# EAGLE board duckypad (EAGLE 9.6.2)
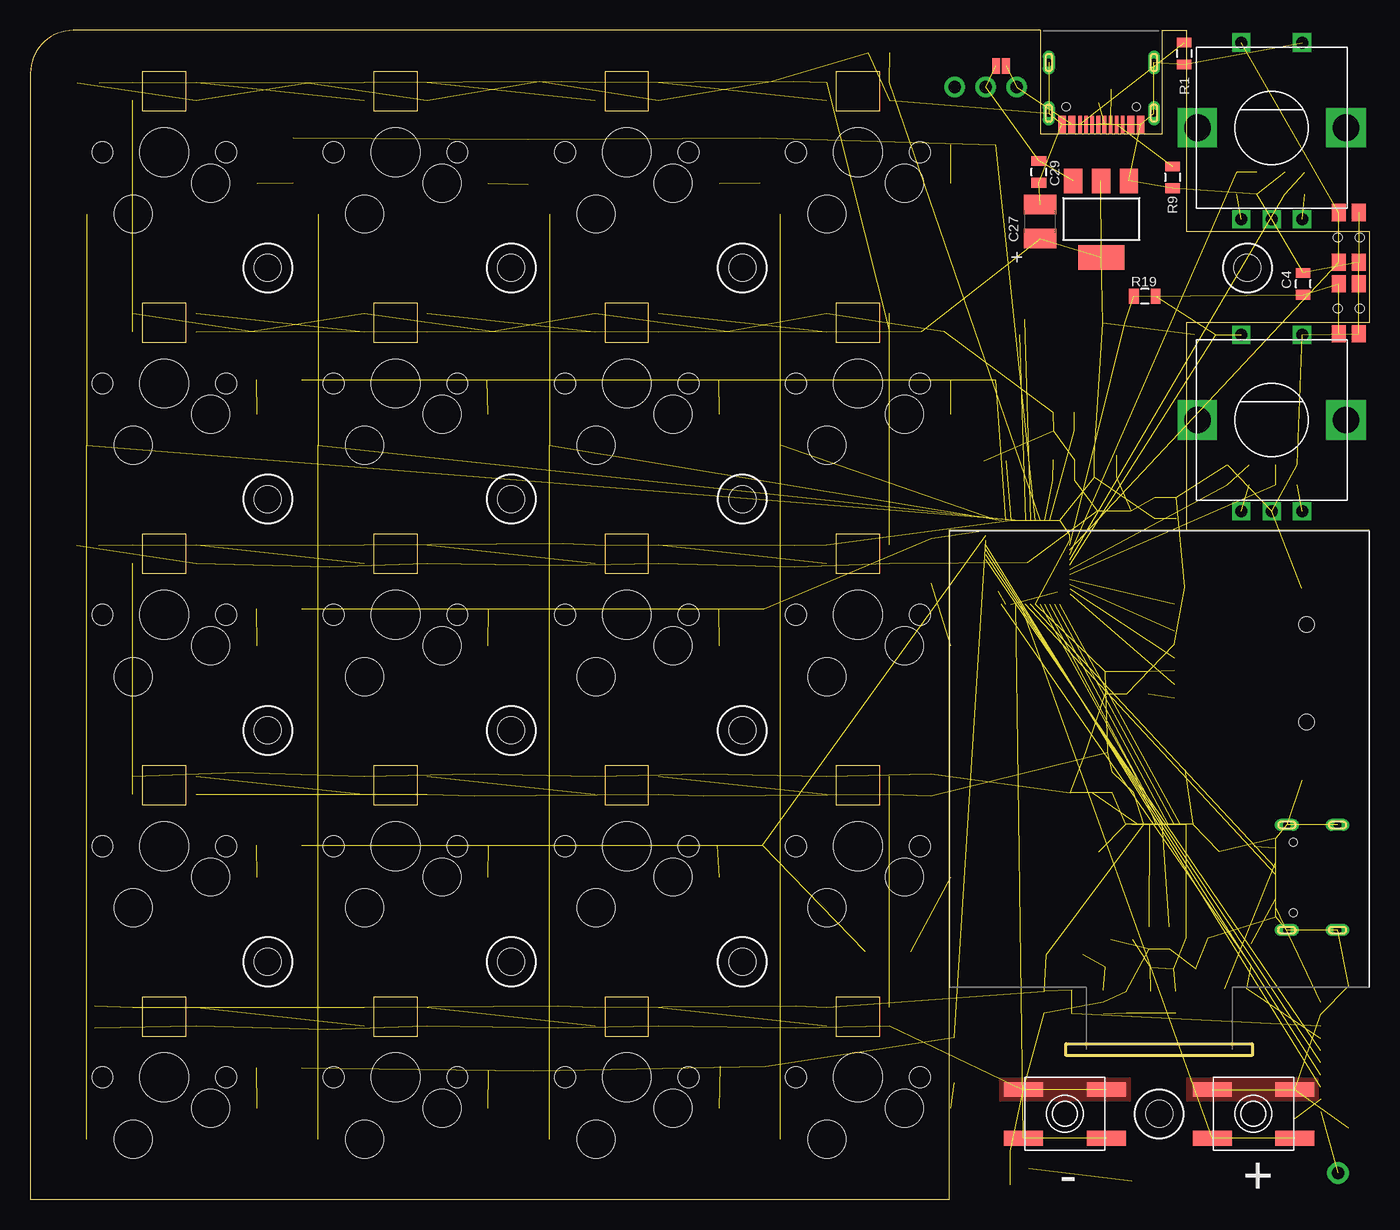
[diagram p0: board, top side]
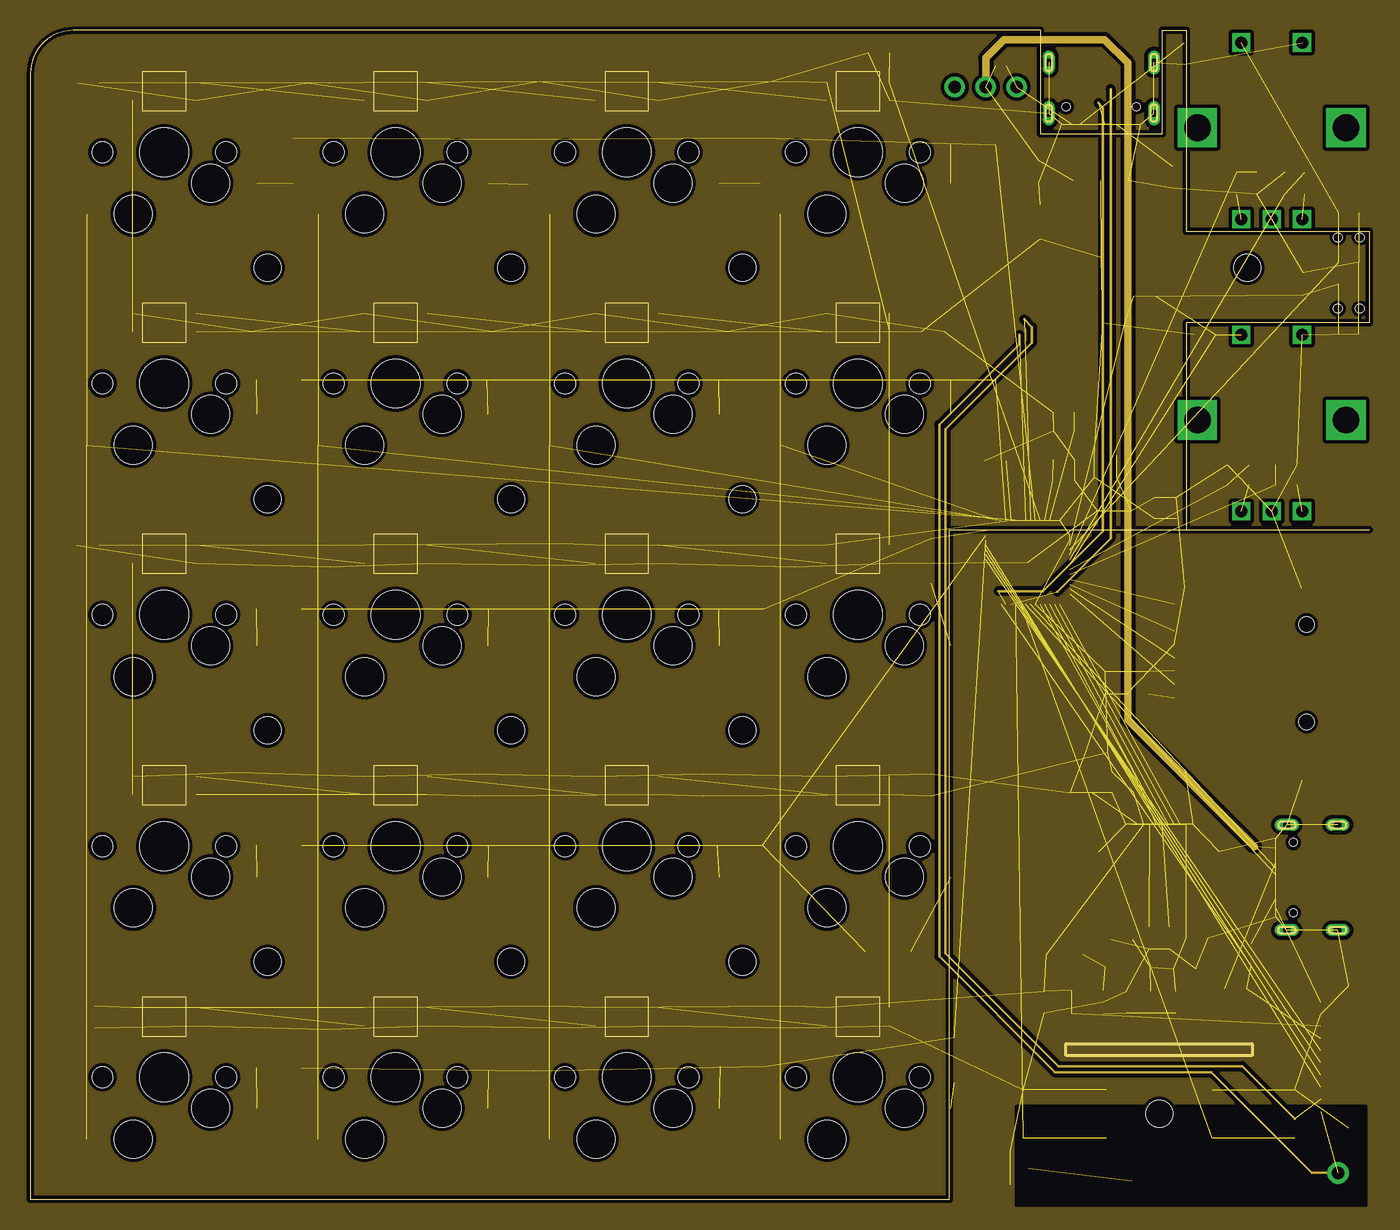
[diagram p1: board, inner layer pwr]
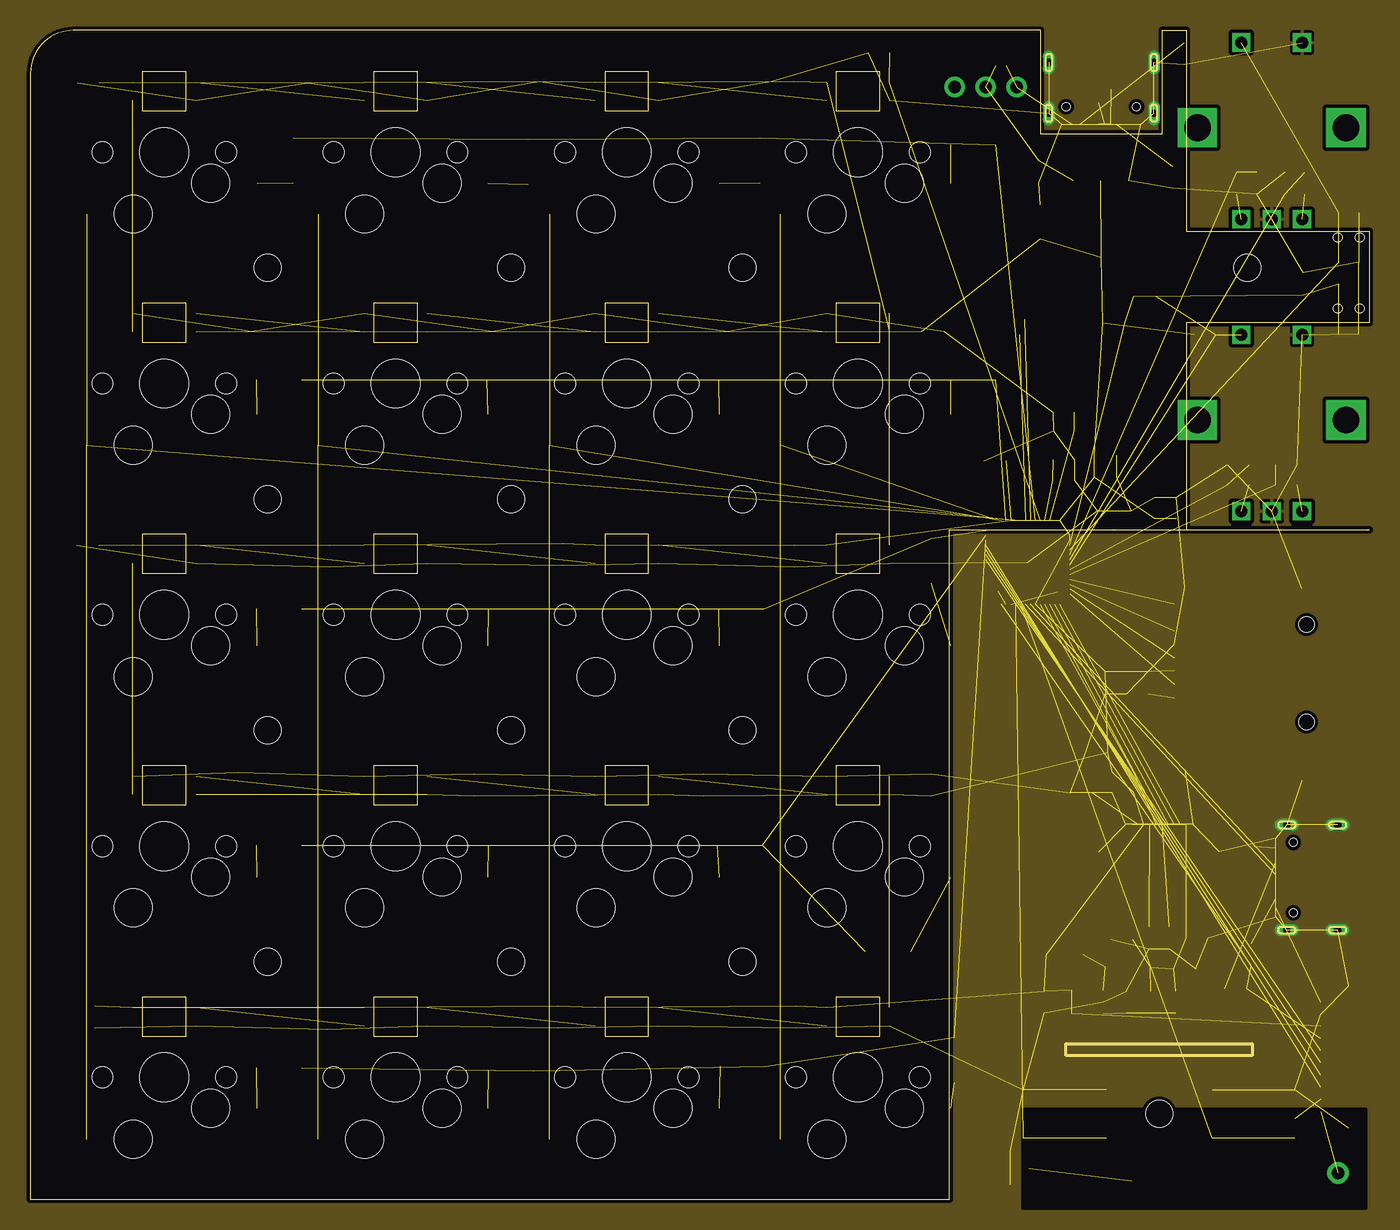
[diagram p2: board, inner layer gnd]
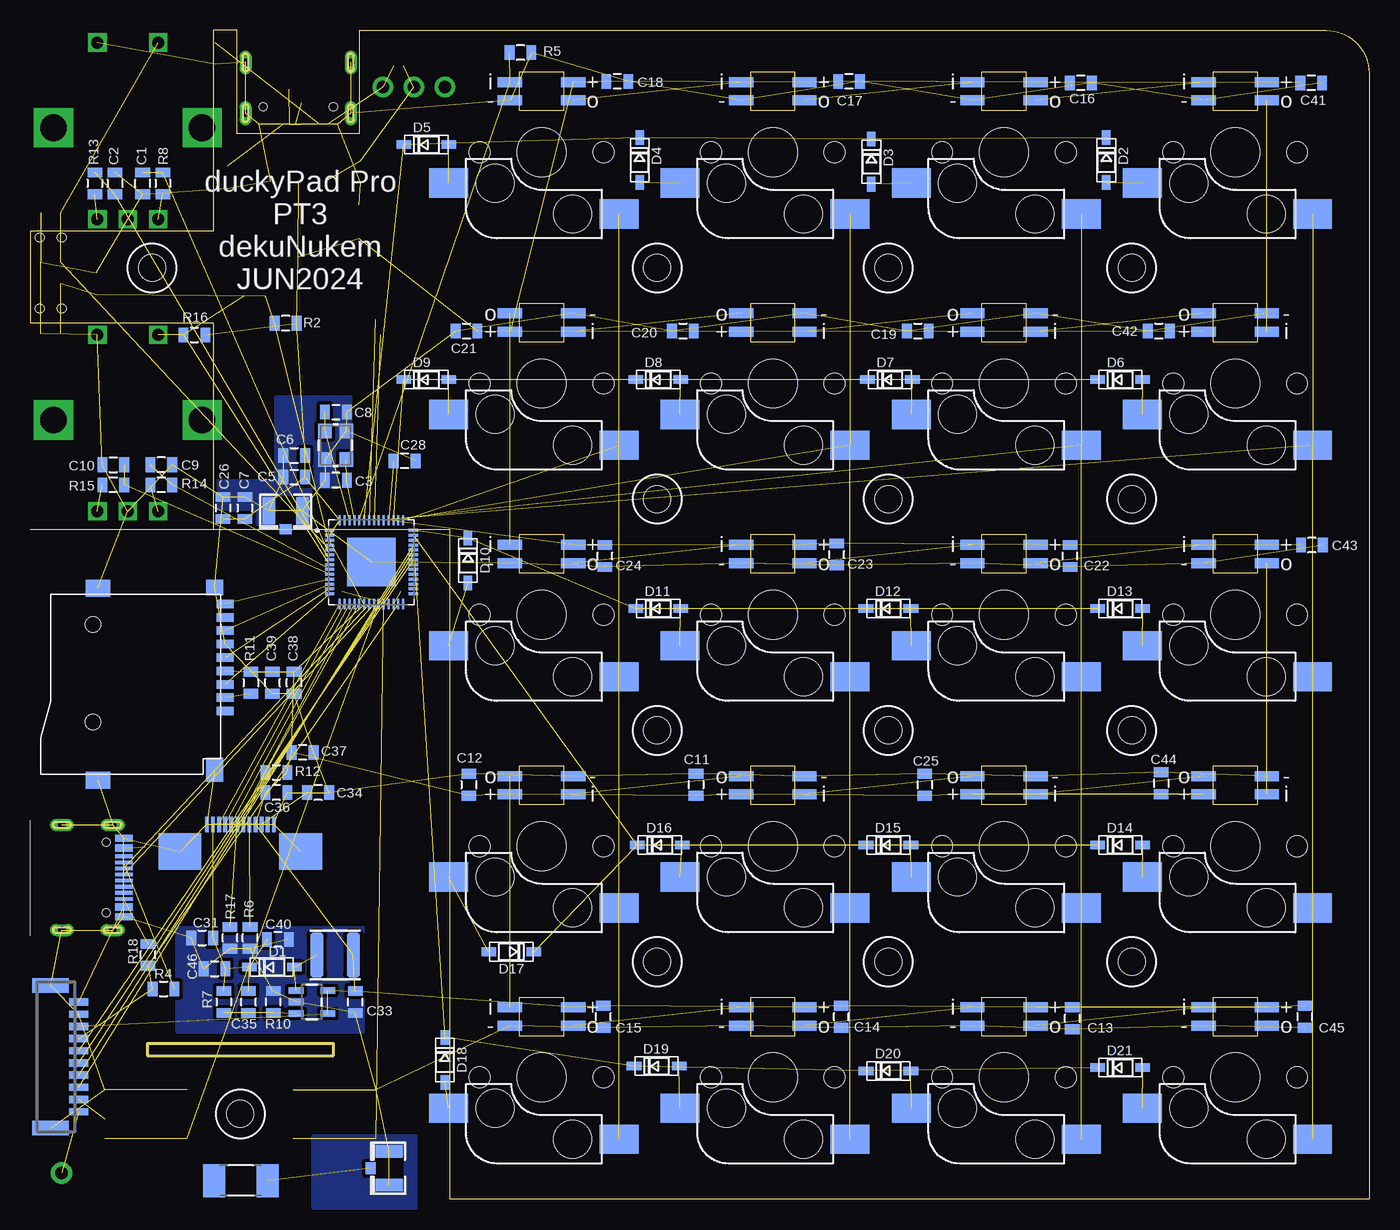
[diagram p3: board, bottom side, seen from below]

Size 110 x 96 mm. Coordinates in mm from the lower left corner, seen from the top.
Outline: 95,55 75.5,55 75.5,0 0,0 0,92.5 arc-90 3.5,96 83,96 83,87.5 93,87.5 93,96 95,96 95,79.5 110,79.5 110,72 95,72 95,55
Outline: 95,55 110,55
Copper layers (1+2*15+16): Top 0.035559375mm / dielectric 0.47751875mm / pwr 0.035559375mm / dielectric 0.47751875mm / gnd 0.035559375mm / dielectric 0.47751875mm / Bottom 0.035559375mm
Design rules "SparkFun-4-Layer-General-JLCPCB *": minimum track width 6mil, minimum drill 12mil, track to track 6mil, track to pad 6mil, pad to pad 6mil, via to via 6mil, smd to smd 6mil, copper to edge 6mil, drill to drill 6mil, minimum pad ring 7mil, minimum via ring 7mil, stop-mask expansion 3mil, vias tented up to drill 25mil, thermal gap 10mil
tRestrict: area 77.2,89.7 to 82.8,93; area 77.1,90.4 to 82.6,93.7
bRestrict: area 76.9,89.7 to 82.5,93

## Footprints (pad centres in the part's own frame; a part is rotated, then mirrored left to right if it is on the bottom)
0805 = smd 0.8 x 1.2: 1 -0.9,0; 2 0.9,0
C1210 = smd 1.6 x 2.7: 1 -1.4,0; 2 1.4,0
ADAFRUIT_CHANGED_SOD-123 = smd 1.2 x 0.7: A 1.85,0; C -1.85,0
SOT223 = smd 1.499 x 2.007: 1 -2.261,-3.15; 2 0.025,-3.15; 3 2.311,-3.15 | smd 3.81 x 2.007: 4 0,3.15
SMT-JUMPER_2_NO_NO-SILK = smd 0.635 x 1.27: 1 -0.406,0; 2 0.406,0
1X03-CLEANBIG = drill 1.016 pad 1.676: 1 -2.54,0; 2 0,0; 3 2.54,0
1X01-CLEANBIG = drill 1.016 pad 1.778: 1 0,0
L4030 = smd 1.1 x 3.7: 1 -1.5,0; 2 1.5,0
REVERSE_MNT = smd 2 x 0.82 bottom: DIN -2.6,-0.75; DOUT 2.6,0.75; GND -2.6,0.75; VDD 2.6,-0.75
R2010 = smd 1.8 x 2.7: 1 -2.2,0; 2 2.2,0
TF-PULL = smd 0.7 x 1.4: 1 -2.2,-7.62; 2 -1.1,-7.62; 3 0,-7.62; 4 1.1,-7.62; 5 2.2,-7.62; 6 3.3,-7.62; 7 4.4,-7.62; 8 5.5,-7.62; 9 6.6,-7.62 | smd 1.4 x 2: S1 -7.9,2.85; S2 7.9,2.85 | smd 1.28 x 1.4: S3 7.96,-6.75 | smd 1.95 x 1.4: S4 -7.025,-6.75 | hole 1.25: -3.1,3.25; 4.9,3.25
EVQ-Q2 = smd 3.2 x 1.2: A -3.4,-2; A' 3.4,-2; B -3.4,2; B' 3.4,2
342_SWICH_FOOT_HOLE = smd 1.4 x 1.15: P$1 -2.05,-0.825; P$2 -2.05,0.825; P$3 2.05,0.825; P$4 2.05,-0.825 | hole 0.7: 0,0.9; 0,-0.9
ALPS_EC12E_SW = drill 1 square: A -2.5,-7.5; B 2.5,-7.5; C 0,-7.5; D -2.5,7; E 2.5,7 | drill 2.2 square: GND1 -6.1,0; GND2 6.1,0
KAILH_SWITCH_SOCKET_SWITCH_SOCKET = smd 3.2 x 2.4 bottom: 1 6.355,5.08; 2 -7.625,2.54 | hole 4: 0,0 | hole 3.1: -3.81,2.54; 2.54,5.08 | hole 1.7: -5.08,0; 5.08,0
USBC_16P_FOOT = smd 0.6 x 1.45: A1B12 -3.225,3.848; A4B9 -2.425,3.848; B4A9 2.425,3.848; B11A12 3.225,3.848 | smd 0.3 x 1.45: A5 -1.25,3.848; A6 -0.25,3.848; A7 0.25,3.848; A8 1.25,3.848; B5 1.75,3.848; B6 0.75,3.848; B7 -0.75,3.848; B8 -1.75,3.848 | drill 0.6 pad 1 long: P$13 -4.32,2.933; P$14 4.32,2.933; P$15 -4.32,-1.248; P$16 4.32,-1.248 | hole 0.65: -2.89,2.402; 2.89,2.402
QFN40P700X700X90-57N = smd 0.81 x 0.22: 1 -3.445,2.6; 2 -3.445,2.2; 3 -3.445,1.8; 4 -3.445,1.4; 5 -3.445,1; 6 -3.445,0.6; 7 -3.445,0.2; 8 -3.445,-0.2; 9 -3.445,-0.6; 10 -3.445,-1; 11 -3.445,-1.4; 12 -3.445,-1.8; 13 -3.445,-2.2; 14 -3.445,-2.6; 29 3.445,-2.6; 30 3.445,-2.2; 31 3.445,-1.8; 32 3.445,-1.4; 33 3.445,-1; 34 3.445,-0.6; 35 3.445,-0.2; 36 3.445,0.2; 37 3.445,0.6; 38 3.445,1; 39 3.445,1.4; 40 3.445,1.8; 41 3.445,2.2; 42 3.445,2.6 | smd 0.22 x 0.81: 15 -2.6,-3.445; 16 -2.2,-3.445; 17 -1.8,-3.445; 18 -1.4,-3.445; 19 -1,-3.445; 20 -0.6,-3.445; 21 -0.2,-3.445; 22 0.2,-3.445; 23 0.6,-3.445; 24 1,-3.445; 25 1.4,-3.445; 26 1.8,-3.445; 27 2.2,-3.445; 28 2.6,-3.445; 43 2.6,3.445; 44 2.2,3.445; 45 1.8,3.445; 46 1.4,3.445; 47 1,3.445; 48 0.6,3.445; 49 0.2,3.445; 50 -0.2,3.445; 51 -0.6,3.445; 52 -1,3.445; 53 -1.4,3.445; 54 -1.8,3.445; 55 -2.2,3.445; 56 -2.6,3.445 | smd 4 x 4: 57 0,0
OLED_LUL_UG-2864HSWEG01_1.3_WRAPAROUND = smd 0.31 x 1.28 bottom: 1 -2.75,-0.22; 2 -2.25,-0.22; 3 -1.75,-0.22; 4 -1.25,-0.22; 5 -0.75,-0.22; 6 -0.25,-0.22; 7 0.25,-0.22; 8 0.75,-0.22; 9 1.25,-0.22; 10 1.75,-0.22; 11 2.25,-0.22; 12 2.75,-0.22 | smd 3.5 x 3 bottom: 31 -4.95,-2.46; 32 4.95,-2.46
DUCKYPAD_SM12B-SSR-H-TB = smd 0.6 x 1.55: 1 -4.5,1.925; 2 -3.5,1.925; 3 -2.5,1.925; 4 -1.5,1.925; 5 -0.5,1.925; 6 0.5,1.925; 7 1.5,1.925; 8 2.5,1.925; 9 3.5,1.925; 10 4.5,1.925 | smd 1.2 x 3: FIT@1 -5.85,-0.4; FIT@2 5.85,-0.4
M2_SCREW_FOOT = hole 2.2: 0,0
SOT23-5 = smd 0.55 x 1.2: 1 -0.95,-1.3; 2 0,-1.3; 3 0.95,-1.3; 4 0.95,1.3; 5 -0.95,1.3
U.FL = smd 2.2 x 1.05: 1 0,1.375; 2 0,-1.375 | smd 0.8 x 1: 3 1.525,0
CRYSTAL-SMD-3.2X2.5MM = smd 1.2 x 1.1: 1 -1.175,-0.875; 2 1.175,-0.875; 3 1.175,0.875; 4 -1.175,0.875

## Placement (x,y rotation side)
C1  100nF  [0805]  100.77,83.44 90 bottom
C2  100nF  [0805]  103.06,83.44 270 bottom
C3  12pF  [0805]  84.9,59.05 180 bottom
C4  100nF  [0805]  104.58,75.18 90 top
C5  1uF  [0805]  88.33,59.31 0 bottom
C6  100nF  [0805]  88.33,61.09 0 bottom
C7  1uF  [0805]  92.39,56.77 270 bottom
C8  12pF  [0805]  84.9,64.64 0 bottom
C9  100nF  [0805]  99.25,60.33 180 bottom
C10  100nF  [0805]  103.19,60.33 0 bottom
C11  100nF  [0805]  55.31,34.04 270 bottom
C12  100nF  [0805]  73.97,34.04 270 bottom
C13  100nF  [0805]  24.38,14.86 90 bottom
C14  100nF  [0805]  43.37,14.99 90 bottom
C15  100nF  [0805]  62.93,14.99 90 bottom
C16  100nF  [0805]  23.68,91.69 180 bottom
C17  100nF  [0805]  42.73,91.82 180 bottom
C18  100nF  [0805]  61.78,91.82 180 bottom
C19  100nF  [0805]  37.08,71.31 0 bottom
C20  100nF  [0805]  56.39,71.31 0 bottom
C21  100nF  [0805]  74.17,71.31 0 bottom
C22  100nF  [0805]  24.57,52.83 90 bottom
C23  100nF  [0805]  43.75,52.96 90 bottom
C24  100nF  [0805]  62.8,52.83 90 bottom
C25  100nF  [0805]  36.51,34.04 270 bottom
C26  100nF  [0805]  94.17,56.77 270 bottom
C27  100uF  [C1210]  82.97,80.3 90 top
C28  100nF  [0805]  79.25,60.64 180 bottom
C29  4.7uF  [0805]  82.87,84.38 90 top
C31  100nF  [0805]  95.89,21.46 0 bottom
C33  4.7uF  [0805]  83.31,16.2 90 bottom
C34  4.7uF  [0805]  86.36,33.4 180 bottom
C35  12pF  [0805]  92.08,16.2 90 bottom
C36  4.7uF  [0805]  89.79,33.4 180 bottom
C37  100nF  [0805]  87.63,36.7 180 bottom
C38  4.7uF  [0805]  88.33,42.42 90 bottom
C39  100nF  [0805]  90.1,42.42 90 bottom
C40  100nF  [0805]  89.66,21.34 180 bottom
C41  100nF  [0805]  4.76,91.69 180 bottom
C42  100nF  [0805]  17.27,71.31 0 bottom
C43  100nF  [0805]  4.7,53.72 180 bottom
C44  100nF  [0805]  17.08,34.16 270 bottom
C45  100nF  [0805]  5.27,14.99 90 bottom
C46  4.7uF  [0805]  94.87,18.92 0 bottom
D1  1N4148  [ADAFRUIT_CHANGED_SOD-123]  90.17,19.05 0 bottom
D2  1N4148  [ADAFRUIT_CHANGED_SOD-123]  21.59,85.34 270 bottom
D3  1N4148  [ADAFRUIT_CHANGED_SOD-123]  40.89,85.22 270 bottom
D4  1N4148  [ADAFRUIT_CHANGED_SOD-123]  59.94,85.34 270 bottom
D5  1N4148  [ADAFRUIT_CHANGED_SOD-123]  77.47,86.61 0 bottom
D6  1N4148  [ADAFRUIT_CHANGED_SOD-123]  20.45,67.31 0 bottom
D7  1N4148  [ADAFRUIT_CHANGED_SOD-123]  39.37,67.31 0 bottom
D8  1N4148  [ADAFRUIT_CHANGED_SOD-123]  58.42,67.31 0 bottom
D9  1N4148  [ADAFRUIT_CHANGED_SOD-123]  77.47,67.31 0 bottom
D10  1N4148  [ADAFRUIT_CHANGED_SOD-123]  74.04,52.45 270 bottom
D11  1N4148  [ADAFRUIT_CHANGED_SOD-123]  58.42,48.51 0 bottom
D12  1N4148  [ADAFRUIT_CHANGED_SOD-123]  39.5,48.51 0 bottom
D13  1N4148  [ADAFRUIT_CHANGED_SOD-123]  20.45,48.51 0 bottom
D14  1N4148  [ADAFRUIT_CHANGED_SOD-123]  20.45,29.08 0 bottom
D15  1N4148  [ADAFRUIT_CHANGED_SOD-123]  39.5,29.08 0 bottom
D16  1N4148  [ADAFRUIT_CHANGED_SOD-123]  58.29,29.08 0 bottom
D17  1N4148  [ADAFRUIT_CHANGED_SOD-123]  70.48,20.32 180 bottom
D18  1N4148  [ADAFRUIT_CHANGED_SOD-123]  75.95,11.43 270 bottom
D19  1N4148  [ADAFRUIT_CHANGED_SOD-123]  58.55,10.92 0 bottom
D20  1N4148  [ADAFRUIT_CHANGED_SOD-123]  39.5,10.54 0 bottom
D21  1N4148  [ADAFRUIT_CHANGED_SOD-123]  20.45,10.79 0 bottom
IC2  REG1117  [SOT223]  88,80.5 180 top
JP1  JUMPER-SMT_2_NO_NO-SILK  [SMT-JUMPER_2_NO_NO-SILK]  79.76,93.09 180 top
JP2  [1X03-CLEANBIG]  78.5,91.35 0 bottom
JP3  [1X01-CLEANBIG]  107.44,2.16 0 top
L2  4.7uH  [L4030]  84.96,20.07 180 bottom
LED_R1C1  WS2812B  [REVERSE_MNT]  11,91 180 top
LED_R1C2  WS2812B  [REVERSE_MNT]  30,91 180 top
LED_R1C3  WS2812B  [REVERSE_MNT]  49,91 180 top
LED_R1C4  WS2812B  [REVERSE_MNT]  68,91 180 top
LED_R2C1  WS2812B  [REVERSE_MNT]  11,72 0 top
LED_R2C2  WS2812B  [REVERSE_MNT]  30,72 0 top
LED_R2C3  WS2812B  [REVERSE_MNT]  49,72 0 top
LED_R2C4  WS2812B  [REVERSE_MNT]  68,72 0 top
LED_R3C1  WS2812B  [REVERSE_MNT]  11,53 180 top
LED_R3C2  WS2812B  [REVERSE_MNT]  30,53 180 top
LED_R3C3  WS2812B  [REVERSE_MNT]  49,53 180 top
LED_R3C4  WS2812B  [REVERSE_MNT]  68,53 180 top
LED_R4C1  WS2812B  [REVERSE_MNT]  11,34 0 top
LED_R4C2  WS2812B  [REVERSE_MNT]  30,34 0 top
LED_R4C3  WS2812B  [REVERSE_MNT]  49,34 0 top
LED_R4C4  WS2812B  [REVERSE_MNT]  68,34 0 top
LED_R5C1  WS2812B  [REVERSE_MNT]  11,15 180 top
LED_R5C2  WS2812B  [REVERSE_MNT]  30,15 180 top
LED_R5C3  WS2812B  [REVERSE_MNT]  49,15 180 top
LED_R5C4  WS2812B  [REVERSE_MNT]  68,15 180 top
R1  5.1K  [0805]  94.8,94.11 270 top
R2  62K  [0805]  89.03,71.95 180 bottom
R3  [R2010]  92.71,1.52 180 bottom
R4  470  [0805]  99.06,17.27 0 bottom
R5  10K  [0805]  69.73,94.17 180 bottom
R6  510K  [0805]  91.95,21.46 90 bottom
R7  510K  [0805]  94.11,16.2 270 bottom
R8  5K1  [0805]  99.12,83.44 270 bottom
R9  5.1K  [0805]  93.85,83.93 270 top
R10  62K  [0805]  90.04,16.2 90 bottom
R11  10K  [0805]  91.88,42.42 270 bottom
R12  10K  [0805]  89.79,35.05 0 bottom
R13  5K1  [0805]  104.71,83.44 270 bottom
R14  5K1  [0805]  99.25,58.67 180 bottom
R15  5K1  [0805]  103.19,58.67 180 bottom
R16  10K  [0805]  96.52,70.99 0 bottom
R17  10K  [0805]  93.6,21.46 90 bottom
R18  470  [0805]  100.33,20.07 90 bottom
R19  DNP  [0805]  91.57,74.17 180 top
SD1  TF-HOLDER  [TF-PULL]  101.6,42.29 90 bottom
SW1  SPST_TACT-EVQQ2  [EVQ-Q2]  100.5,7 180 top
SW2  SPST_TACT-EVQQ2  [EVQ-Q2]  85,7 180 top
SW3  324_SW324_SWITCH_FOOT_HOLE  [342_SWICH_FOOT_HOLE]  108.33,73.15 90 top
SW4  324_SW324_SWITCH_FOOT_HOLE  [342_SWICH_FOOT_HOLE]  108.33,78.99 90 top
SW21  EC12E_SW  [ALPS_EC12E_SW]  102,64 0 top
SW22  EC12E_SW  [ALPS_EC12E_SW]  102,88 0 top
SWR1C1  KAILH_SWITCH_SOCKET_KAILH_SWITCH_SOCKET  [KAILH_SWITCH_SOCKET_SWITCH_SOCKET]  11,86 180 top
SWR1C2  KAILH_SWITCH_SOCKET_KAILH_SWITCH_SOCKET  [KAILH_SWITCH_SOCKET_SWITCH_SOCKET]  30,86 180 top
SWR1C3  KAILH_SWITCH_SOCKET_KAILH_SWITCH_SOCKET  [KAILH_SWITCH_SOCKET_SWITCH_SOCKET]  49,86 180 top
SWR1C4  KAILH_SWITCH_SOCKET_KAILH_SWITCH_SOCKET  [KAILH_SWITCH_SOCKET_SWITCH_SOCKET]  68,86 180 top
SWR2C1  KAILH_SWITCH_SOCKET_KAILH_SWITCH_SOCKET  [KAILH_SWITCH_SOCKET_SWITCH_SOCKET]  11,67 180 top
SWR2C2  KAILH_SWITCH_SOCKET_KAILH_SWITCH_SOCKET  [KAILH_SWITCH_SOCKET_SWITCH_SOCKET]  30,67 180 top
SWR2C3  KAILH_SWITCH_SOCKET_KAILH_SWITCH_SOCKET  [KAILH_SWITCH_SOCKET_SWITCH_SOCKET]  49,67 180 top
SWR2C4  KAILH_SWITCH_SOCKET_KAILH_SWITCH_SOCKET  [KAILH_SWITCH_SOCKET_SWITCH_SOCKET]  68,67 180 top
SWR3C1  KAILH_SWITCH_SOCKET_KAILH_SWITCH_SOCKET  [KAILH_SWITCH_SOCKET_SWITCH_SOCKET]  11,48 180 top
SWR3C2  KAILH_SWITCH_SOCKET_KAILH_SWITCH_SOCKET  [KAILH_SWITCH_SOCKET_SWITCH_SOCKET]  30,48 180 top
SWR3C3  KAILH_SWITCH_SOCKET_KAILH_SWITCH_SOCKET  [KAILH_SWITCH_SOCKET_SWITCH_SOCKET]  49,48 180 top
SWR3C4  KAILH_SWITCH_SOCKET_KAILH_SWITCH_SOCKET  [KAILH_SWITCH_SOCKET_SWITCH_SOCKET]  68,48 180 top
SWR4C1  KAILH_SWITCH_SOCKET_KAILH_SWITCH_SOCKET  [KAILH_SWITCH_SOCKET_SWITCH_SOCKET]  11,29 180 top
SWR4C2  KAILH_SWITCH_SOCKET_KAILH_SWITCH_SOCKET  [KAILH_SWITCH_SOCKET_SWITCH_SOCKET]  30,29 180 top
SWR4C3  KAILH_SWITCH_SOCKET_KAILH_SWITCH_SOCKET  [KAILH_SWITCH_SOCKET_SWITCH_SOCKET]  49,29 180 top
SWR4C4  KAILH_SWITCH_SOCKET_KAILH_SWITCH_SOCKET  [KAILH_SWITCH_SOCKET_SWITCH_SOCKET]  68,29 180 top
SWR5C1  KAILH_SWITCH_SOCKET_KAILH_SWITCH_SOCKET  [KAILH_SWITCH_SOCKET_SWITCH_SOCKET]  11,10 180 top
SWR5C2  KAILH_SWITCH_SOCKET_KAILH_SWITCH_SOCKET  [KAILH_SWITCH_SOCKET_SWITCH_SOCKET]  30,10 180 top
SWR5C3  KAILH_SWITCH_SOCKET_KAILH_SWITCH_SOCKET  [KAILH_SWITCH_SOCKET_SWITCH_SOCKET]  49,10 180 top
SWR5C4  KAILH_SWITCH_SOCKET_KAILH_SWITCH_SOCKET  [KAILH_SWITCH_SOCKET_SWITCH_SOCKET]  68,10 180 top
U1  USBC_16P  [USBC_16P_FOOT]  106.17,26.42 270 bottom
U2  USBC_16P  [USBC_16P_FOOT]  88,92.13 180 top
U3  ESP32-S3FN8  [QFN40P700X700X90-57N]  81.98,52.32 0 bottom
U$2  OLED_OLED128  [OLED_LUL_UG-2864HSWEG01_1.3_WRAPAROUND]  92.75,31 0 top
U$3  SH10P  [DUCKYPAD_SM12B-SSR-H-TB]  107.95,11.68 270 bottom
U$7  M2_SCREW_DEV  [M2_SCREW_FOOT]  39.5,19.5 0 top
U$8  M2_SCREW_DEV  [M2_SCREW_FOOT]  39.5,57.5 0 top
U$9  M2_SCREW_DEV  [M2_SCREW_FOOT]  58.5,76.5 0 top
U$10  M2_SCREW_DEV  [M2_SCREW_FOOT]  92.75,7 0 top
U$11  M2_SCREW_DEV  [M2_SCREW_FOOT]  39.5,76.5 0 top
U$12  M2_SCREW_DEV  [M2_SCREW_FOOT]  39.5,38.5 0 top
U$13  M2_SCREW_DEV  [M2_SCREW_FOOT]  58.5,19.5 0 top
U$14  M2_SCREW_DEV  [M2_SCREW_FOOT]  19.5,76.5 0 top
U$15  M2_SCREW_DEV  [M2_SCREW_FOOT]  58.5,57.5 0 top
U$16  M2_SCREW_DEV  [M2_SCREW_FOOT]  58.5,38.5 0 top
U$17  M2_SCREW_DEV  [M2_SCREW_FOOT]  100,76.5 0 top
U$19  V_REG_TPS61040SMD  [SOT23-5]  86.87,16.2 270 bottom
U$20  M2_SCREW_DEV  [M2_SCREW_FOOT]  19.5,38.5 0 top
U$21  M2_SCREW_DEV  [M2_SCREW_FOOT]  19.5,57.5 0 top
U$22  M2_SCREW_DEV  [M2_SCREW_FOOT]  19.5,19.5 0 top
X1  [U.FL]  89.03,56.56 270 bottom
X2  [U.FL]  80.52,2.54 180 bottom
Y1  16MHz_12pF  [CRYSTAL-SMD-3.2X2.5MM]  84.92,61.93 270 bottom

## Library data of the parts
C1-C29 C31 C33-C46 R5 SD1 = clock
D1-D21 LED_R1C1-LED_R1C4 LED_R2C1-LED_R2C4 LED_R3C1-LED_R3C4 LED_R4C1-LED_R4C4 LED_R5C1-LED_R5C4 U$2 U$3 U$7-U$17 U$20-U$22 = duckypad
IC2 = clock; MPN: REG1117; OC_FARNELL: 1097566; OC_NEWARK: 14P6981
JP1 = SparkFun-Jumpers
JP2 JP3 R3 SW1 SW2 X1 X2 = adafruit_changed
L2 = Discrete
R1 R2 R4 R6-R19 = joyAnalog
SW3 SW4 = 3pos_slide_switch
SW21 SW22 = switch-alps; MPN: EC12E2424407; OC_FARNELL: 1520813; OC_NEWARK: 74M1068
SWR1C1-SWR1C4 SWR2C1-SWR2C4 SWR3C1-SWR3C4 SWR4C1-SWR4C4 SWR5C1-SWR5C4 = lul
U1 U2 = my_usbc_16p
U3 = ESP32-S3FN8; AVAILABILITY: In Stock; CHECK_PRICES: https://www.snapeda.com/parts/ESP32-S3FN8/Espressif+Systems/view-part/?ref=eda; DESCRIPTION: Espressif Systems [ENGINEERING SAMPLES]SMD IC , Dual-Core MCU, Wi-Fi 2.4G & BLE 5.0 combo, 8 MB Octal SPI PSRAM, QFN 56-pin, 7*7 mm; MF: Espressif Systems; MP: ESP32-S3FN8; PACKAGE: None; PRICE: None; SNAPEDA_LINK: https://www.snapeda.com/parts/ESP32-S3FN8/Espressif+Systems/view-part/?ref=snap
U$19 = SparkFun-Retired
Y1 = SparkFun-Clocks; PROD_ID: XTAL-12454

## Nets
12V: C31.2 C35.2 C40.2 C46.2 D1.C R7.1 U$2.2 U$2.11
+3V3: C5.2 C6.2 C7.2 C11.2 C12.2 C13.2 C14.2 C15.2 C16.2 C17.2 C18.2 C19.2 C20.2 C21.2 C22.2 C23.2 C24.2 C25.2 C26.2 C27.1 C28.2 C33.2 C36.2 C37.2 C38.2 C39.2 C41.2 C42.2 C43.2 C44.2 C45.2 IC2.2 IC2.4 L2.1 LED_R1C1.VDD LED_R1C2.VDD LED_R1C3.VDD LED_R1C4.VDD LED_R2C1.VDD LED_R2C2.VDD LED_R2C3.VDD LED_R2C4.VDD LED_R3C1.VDD LED_R3C2.VDD LED_R3C3.VDD LED_R3C4.VDD LED_R4C1.VDD LED_R4C2.VDD LED_R4C3.VDD LED_R4C4.VDD LED_R5C1.VDD LED_R5C2.VDD LED_R5C3.VDD LED_R5C4.VDD R2.1 R11.1 R12.2 R16.2 SD1.4 U3.2 U3.3 U3.20 U3.46 U3.55 U3.56 U$2.4 U$3.3 U$19.4 U$19.5
AUX_DN: U1.A7 U1.B7 U3.21
AUX_DP: U1.A6 U1.B6 U3.22
CARD_DET: SD1.9 U3.11
CC_BUSY: R4.1 R18.1 U3.27 U$3.4
COL0: SWR1C1.1 SWR2C1.1 SWR3C1.1 SWR4C1.1 SWR5C1.1 U3.48
COL1: SWR1C2.1 SWR2C2.1 SWR3C2.1 SWR4C2.1 SWR5C2.1 U3.47
COL2: SWR1C3.1 SWR2C3.1 SWR3C3.1 SWR4C3.1 SWR5C3.1 U3.44
COL3: SWR1C4.1 SWR2C4.1 SWR3C4.1 SWR4C4.1 SWR5C4.1 U3.43
DC: U3.17 U$2.8
GND: C1.1 C2.1 C3.2 C4.2 C5.1 C6.1 C7.1 C8.2 C9.1 C10.1 C11.1 C12.1 C13.1 C14.1 C15.1 C16.1 C17.1 C18.1 C19.1 C20.1 C21.1 C22.1 C23.1 C24.1 C25.1 C26.1 C27.2 C28.1 C29.1 C31.1 C33.1 C34.1 C36.1 C37.1 C38.1 C39.1 C40.1 C41.1 C42.1 C43.1 C44.1 C45.1 C46.1 IC2.1 LED_R1C1.GND LED_R1C2.GND LED_R1C3.GND LED_R1C4.GND LED_R2C1.GND LED_R2C2.GND LED_R2C3.GND LED_R2C4.GND LED_R3C1.GND LED_R3C2.GND LED_R3C3.GND LED_R3C4.GND LED_R4C1.GND LED_R4C2.GND LED_R4C3.GND LED_R4C4.GND LED_R5C1.GND LED_R5C2.GND LED_R5C3.GND LED_R5C4.GND R1.2 R5.1 R6.1 R9.2 R10.2 R17.1 SD1.6 SD1.S1 SD1.S2 SD1.S3 SD1.S4 SW1.A SW1.A' SW2.A SW2.A' SW3.P$1 SW3.P$4 SW4.P$1 SW4.P$4 SW21.C SW21.E SW22.C SW22.E U1.A1B12 U1.B11A12 U1.P$13 U1.P$14 U1.P$15 U1.P$16 U2.A1B12 U2.B11A12 U2.P$13 U2.P$14 U2.P$15 U2.P$16 U3.57 U$2.1 U$2.12 U$2.31 U$2.32 U$3.2 U$3.FIT@1 U$3.FIT@2 U$19.2 X1.1 X1.2 X2.1 X2.2 Y1.2 Y1.4
MOSI: U3.15 U$2.10
N$1: JP1.1 JP2.1 U2.A4B9 U2.B4A9
N$2: LED_R1C3.DIN LED_R1C4.DOUT
N$3: LED_R1C2.DIN LED_R1C3.DOUT
N$4: LED_R1C1.DIN LED_R1C2.DOUT
N$5: LED_R1C1.DOUT LED_R2C1.DIN
N$6: LED_R2C1.DOUT LED_R2C2.DIN
N$7: LED_R2C2.DOUT LED_R2C3.DIN
N$8: C34.2 U$2.3
N$9: LED_R2C3.DOUT LED_R2C4.DIN
N$10: R6.2 U$2.5
N$11: LED_R2C4.DOUT LED_R3C4.DIN
N$12: LED_R3C3.DIN LED_R3C4.DOUT
N$13: LED_R3C2.DIN LED_R3C3.DOUT
N$14: C9.2 R14.1 U3.9
N$15: LED_R3C1.DIN LED_R3C2.DOUT
N$16: LED_R3C1.DOUT LED_R4C1.DIN
N$17: LED_R4C1.DOUT LED_R4C2.DIN
N$18: LED_R4C2.DOUT LED_R4C3.DIN
N$19: LED_R4C3.DOUT LED_R4C4.DIN
N$20: LED_R4C4.DOUT LED_R5C4.DIN
N$21: LED_R5C3.DIN LED_R5C4.DOUT
N$22: LED_R5C2.DIN LED_R5C3.DOUT
N$23: LED_R5C1.DIN LED_R5C2.DOUT
N$24: C8.1 U3.54 Y1.1
N$25: C3.1 U3.53 Y1.3
N$26: U3.1 X1.3
N$27: D5.A SWR1C4.2
N$28: SW4.P$2 SW4.P$3 SW22.D U3.5
N$29: LED_R1C4.DIN R5.2 U3.52
N$30: SW1.B SW1.B' U3.23
N$31: R1.1 U2.B5
N$32: R4.2 U1.A5
N$33: R9.1 U2.A5
N$34: R8.2 SW22.A
N$35: R13.2 SW22.B
N$36: D1.A L2.2 U$19.1
N$38: C1.2 R8.1 U3.6
N$39: C35.1 R7.2 R10.1 U$19.3
N$40: C2.2 R13.1 U3.7
N$41: R16.1 R19.1 SW21.D U3.8
N$42: R15.2 SW21.B
N$43: R11.2 SD1.2
N$44: D4.A SWR1C3.2
N$45: D3.A SWR1C2.2
N$46: D2.A SWR1C1.2
N$47: D9.A SWR2C4.2
N$48: R14.2 SW21.A
N$49: C10.2 R15.1 U3.10
N$50: D8.A SWR2C3.2
N$51: D7.A SWR2C2.2
N$52: D6.A SWR2C1.2
N$53: D10.A SWR3C4.2
N$54: D11.A SWR3C3.2
N$55: D12.A SWR3C2.2
N$56: D13.A SWR3C1.2
N$57: D17.A SWR4C4.2
N$58: D16.A SWR4C3.2
N$59: D15.A SWR4C2.2
N$60: D14.A SWR4C1.2
N$61: D18.A SWR5C4.2
N$62: D19.A SWR5C3.2
N$63: D20.A SWR5C2.2
N$64: D21.A SWR5C1.2
N$65: SW2.B SW2.B' U3.24
N$66: C29.2 IC2.3 JP1.2 JP2.2 U1.A4B9 U1.B4A9 U$3.1
N$67: U3.36 U$3.5
N$68: U3.37 U$3.6
N$69: U3.38 U$3.7
N$70: U3.39 U$3.8
N$71: R3.1 X2.3
N$72: U3.50 U$3.9
N$73: JP3.1 U3.49 U$3.10
N$80: R18.2 U1.B5
OLED_CS: R12.1 U3.19 U$2.6
OLED_RESET: R17.2 U3.18 U$2.7
RESET: C4.1 R2.2 R19.2 SW3.P$2 SW3.P$3 U3.4
ROW0: D2.C D3.C D4.C D5.C U3.51
ROW1: D6.C D7.C D8.C D9.C U3.45
ROW2: D10.C D11.C D12.C D13.C U3.42
ROW3: D14.C D15.C D16.C D17.C U3.41
ROW4: D18.C D19.C D20.C D21.C U3.40
SCLK: U3.16 U$2.9
SD_CLK: SD1.5 U3.13
SD_CMD: SD1.3 U3.14
SD_D0: SD1.7 U3.12
USB_DN: U2.A7 U2.B7 U3.25
USB_DP: U2.A6 U2.B6 U3.26
VDD_SPI: U3.29

## Tracks (layer width: path | path; a pad name or v marks a point on that pad's centre or on a via)
12V  (7 unrouted)
+3V3  (68 unrouted)
  pour pwr (isolate 0.305): -6.48,107.7 127.13,107.7 127.13,-13.08 -6.48,-13.08
AUX_DN  (2 unrouted)
AUX_DP  (2 unrouted)
CARD_DET  (1 unrouted)
CC_BUSY  (3 unrouted)
COL0  (5 unrouted)
COL1  (5 unrouted)
COL2  (5 unrouted)
COL3  (5 unrouted)
DC  (1 unrouted)
GND  (113 unrouted)
  pour Top (isolate 0.305, no thermals): 79.69,9.91 90.36,9.91 90.36,8.13 79.69,8.13
  pour Top (isolate 0.305, no thermals): 95.06,9.91 105.72,9.91 105.72,8.13 95.06,8.13
  pour Bottom (isolate 0.305, no thermals): 83.63,65.91 89.85,65.91 89.85,58.42 83.63,58.42
  pour Bottom (isolate 0.305, no thermals): 86.93,59.05 94.68,59.05 94.68,54.61 86.93,54.61
  pour Bottom (isolate 0.305, no thermals): 78.29,5.21 86.8,5.21 86.8,-0.76 78.29,-0.76
  pour gnd (isolate 0.305): -11.81,111.38 130.05,111.38 130.05,-16.89 -11.81,-16.89
  pour Bottom (isolate 0.305, no thermals): 82.61,22.35 97.98,22.35 97.98,13.72 82.61,13.72
MOSI  (1 unrouted)
N$1  (3 unrouted)
N$2  (1 unrouted)
N$3  (1 unrouted)
N$4  (1 unrouted)
N$5  (1 unrouted)
N$6  (1 unrouted)
N$7  (1 unrouted)
N$8  (1 unrouted)
N$9  (1 unrouted)
N$10  (1 unrouted)
N$11  (1 unrouted)
N$12  (1 unrouted)
N$13  (1 unrouted)
N$14  (2 unrouted)
N$15  (1 unrouted)
N$16  (1 unrouted)
N$17  (1 unrouted)
N$18  (1 unrouted)
N$19  (1 unrouted)
N$20  (1 unrouted)
N$21  (1 unrouted)
N$22  (1 unrouted)
N$23  (1 unrouted)
N$24  (2 unrouted)
N$25  (2 unrouted)
N$26  (1 unrouted)
N$27  (1 unrouted)
N$28  (3 unrouted)
N$29  (2 unrouted)
N$30  (2 unrouted)
N$31  (1 unrouted)
N$32  (1 unrouted)
N$33  (1 unrouted)
N$34  (1 unrouted)
N$35  (1 unrouted)
N$36  (2 unrouted)
N$38  (2 unrouted)
N$39  (3 unrouted)
N$40  (2 unrouted)
N$41  (3 unrouted)
N$42  (1 unrouted)
N$43  (1 unrouted)
N$44  (1 unrouted)
N$45  (1 unrouted)
N$46  (1 unrouted)
N$47  (1 unrouted)
N$48  (1 unrouted)
N$49  (2 unrouted)
N$50  (1 unrouted)
N$51  (1 unrouted)
N$52  (1 unrouted)
N$53  (1 unrouted)
N$54  (1 unrouted)
N$55  (1 unrouted)
N$56  (1 unrouted)
N$57  (1 unrouted)
N$58  (1 unrouted)
N$59  (1 unrouted)
N$60  (1 unrouted)
N$61  (1 unrouted)
N$62  (1 unrouted)
N$63  (1 unrouted)
N$64  (1 unrouted)
N$65  (2 unrouted)
N$66  (6 unrouted)
  pwr 0.61: 100.58,28.96 90.17,39.37 90.17,93.34 88.27,95.25 80.01,95.25 78.5,93.74 JP2.2
N$67  (1 unrouted)
N$68  (1 unrouted)
N$69  (1 unrouted)
N$70  (1 unrouted)
N$71  (1 unrouted)
N$72  (2 unrouted)
  pwr 0.203: 81.66,72.26 82.3,71.63 82.3,70.36 75.18,63.25 75.18,20.19 84.45,10.92 99.57,10.92 103.89,6.6
N$73  (2 unrouted)
  pwr 0.203: 81.28,70.99 81.28,70.23 74.68,63.63 74.68,19.94 84.19,10.42 97.02,10.42 105.28,2.16 JP3.1
N$80  (1 unrouted)
OLED_CS  (2 unrouted)
OLED_RESET  (2 unrouted)
RESET  (5 unrouted)
ROW0  (4 unrouted)
ROW1  (4 unrouted)
ROW2  (4 unrouted)
ROW3  (4 unrouted)
ROW4  (4 unrouted)
SCLK  (1 unrouted)
SD_CLK  (1 unrouted)
SD_CMD  (1 unrouted)
SD_D0  (1 unrouted)
USB_DN  (3 unrouted)
  pwr 0.203: 88.77,91.19 88.77,54.3 84.38,49.91
USB_DP  (3 unrouted)
  pwr 0.203: 87.76,90.04 88.14,89.66 88.14,54.86 83.21,49.94 79.55,49.94
WTF2
  cutout gnd: 81.53,7.37 109.73,7.37 109.73,-0.76 81.53,-0.76
  cutout pwr (no thermals): 81.03,7.62 109.73,7.62 109.73,-0.51 81.03,-0.51

## Text on the board
tNames: - | +
bNames: duckyPad Pro / PT3 / dekuNukem / JUN2024
tDocu: watch out for strapping pins / GPIO3 must have pull resistor, pull to high to free up JTAG pins? / / 3.5mm corner radius / / double check RESET jumper has NO PASTE